# Altium PCB AC_board.PcbDoc (part 2 of 3)
Units mil, origin at the board's own origin, x right, y up, seen from the top; angles counter-clockwise.
Board outline 5905.51 x 3937.01 mil, 4 copper layers (Top Layer, Layer 1, Layer 2, Bottom Layer), stack 31.891 mil thick; 42 components, 37 nets, 171 pads, 2365 vias.
Unrouted connection lines stored in the file: 10.
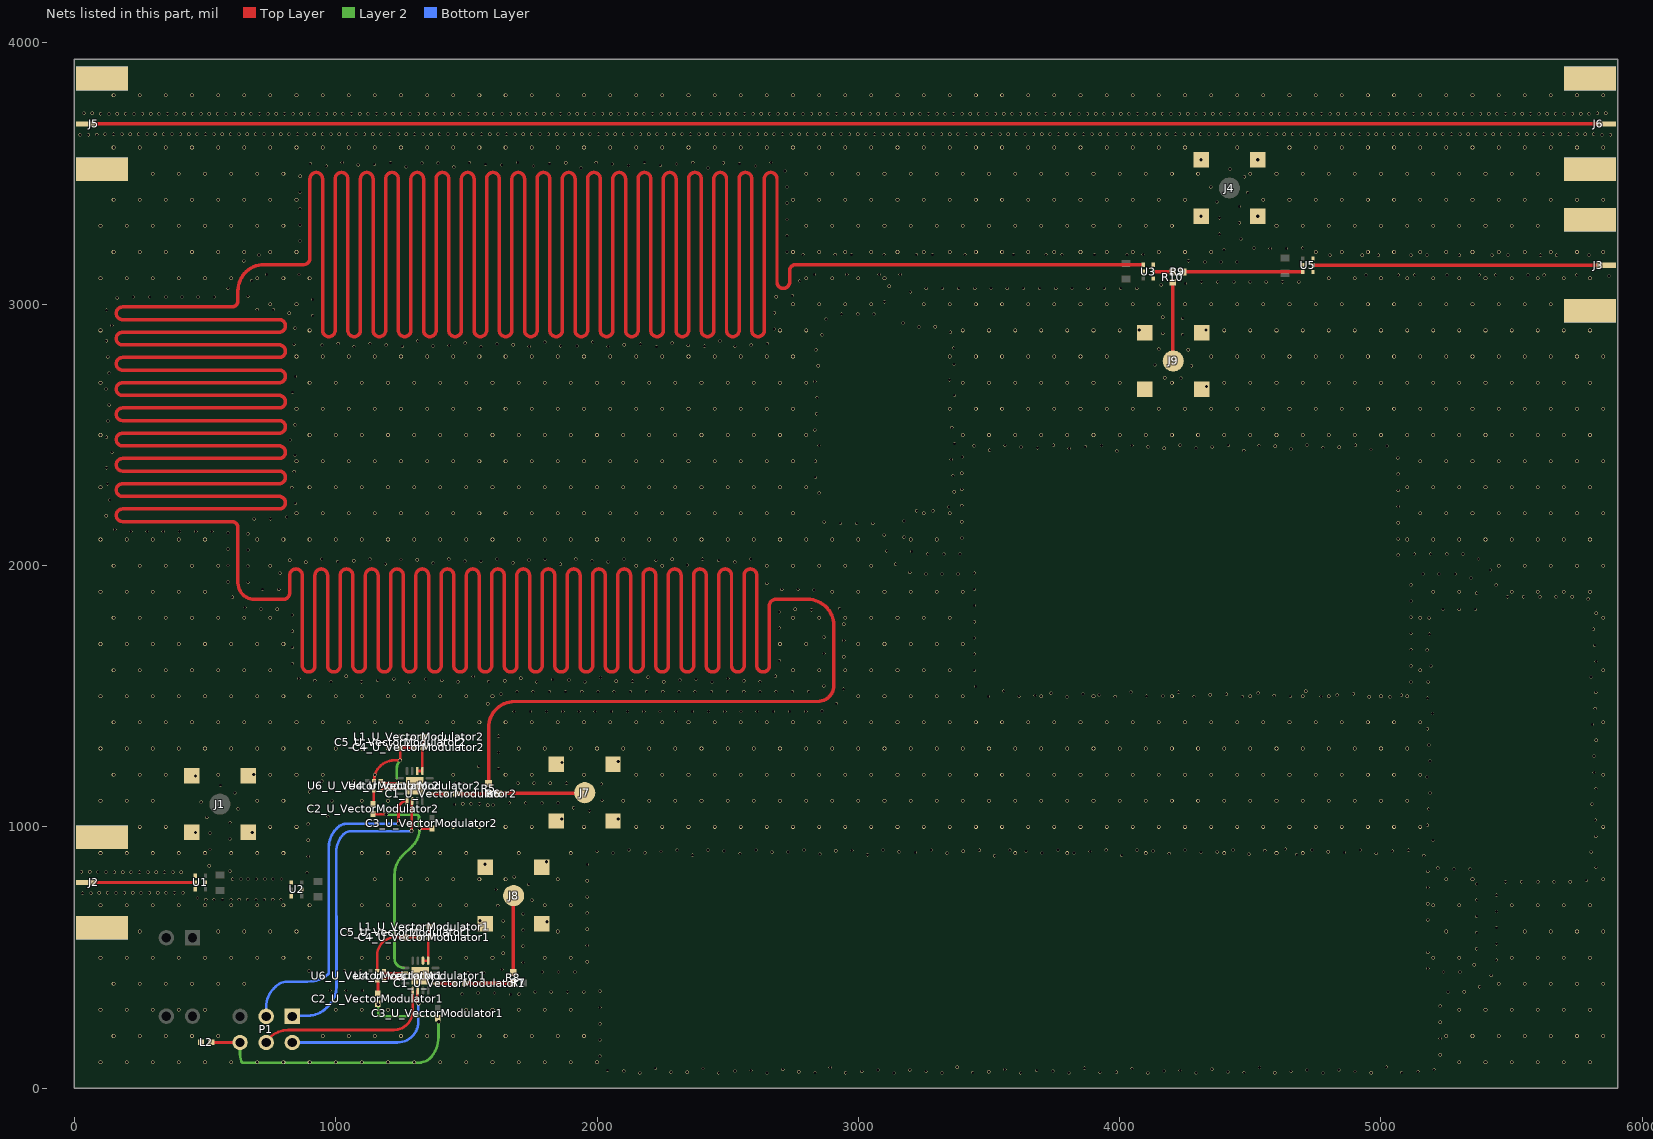
[diagram p4: the nets of this part, all layers, seen from the top]

## Via types
v1: diameter 12, hole 10, Top Layer to Bottom Layer, 1188 vias
v2: diameter 14, hole 10, Top Layer to Bottom Layer, 1145 vias
v3: diameter 15, hole 12, Top Layer to Bottom Layer, 21 vias
v4: diameter 14, hole 12, Top Layer to Bottom Layer, 11 vias

## Nets (pads, with @x,y where several pads share a name; then routed paths per layer and width w, separated by ;. In a path a pad name is that pad's centre, name@x,y a point inside that pad or via, vN(x,y) a via of type N, cw(c..) or ccw(c..) an arc to the next point about the centre after c; other vN are vias at no path point) (continued)
AGND: C2_U_VectorModulator1.1 C2_U_VectorModulator2.1 C3_U_VectorModulator1.1 C3_U_VectorModulator2.1 C4_U_VectorModulator1.1 C4_U_VectorModulator2.1 C5_U_VectorModulator1.1 C5_U_VectorModulator2.1 J1.G1 J1.G2 J1.G3 J1.G4 J2.GND J3.GND J4.G1 J4.G2 J4.G3 J4.G4 J5.GND J6.GND J7.G1 J7.G2 J7.G3 J7.G4 J8.G1 J8.G2 J8.G3 J8.G4 J9.G1 J9.G2 J9.G3 J9.G4 L2.1 L2.2 P1.6 U1.1 U1.3 U1.5 U2.1 U2.3 U2.5 U3.1 U3.3 U3.5 U4_U_VectorModulator1.17 U4_U_VectorModulator2.17 U5.1 U5.3 U5.5 U6_U_VectorModulator1.5 U6_U_VectorModulator2.5 | length 2777.9
  Top Layer w10: L2.2@527.67,175 P1.6@634,175 ; C2_U_VectorModulator2.1@1143.31,1049 ccw(c1144.38,1049) 1144.38,1047.94 v4(1193.28,1047.94) ; U6_U_VectorModulator2.5@1146.31,1176.49 cw(c1224.46,1176.49) 1224.46,1254.63 v4(1246.43,1254.63) 1246.43,1302.11 cw(c1248.31,1302.11) C5_U_VectorModulator2.1@1248.31,1304 C4_U_VectorModulator2.1@1297.63,1304 ; U6_U_VectorModulator1.5@1158.98,450 1158.98,509.93 cw(c1227.06,509.93) 1227.06,578 C5_U_VectorModulator1.1@1270.24,578 C4_U_VectorModulator1.1@1319.56,578 ; v4(1162.84,320.6) cw(c1165.24,320.6) C2_U_VectorModulator1.1@1165.24,323 ; v4(1321.23,993.8) 1368.31,993.8 C3_U_VectorModulator2.1@1368.31,994
  Layer 2 w10: P1.6@634,175 634,129.18 634,129.11 ccw(c709.77,129.11) 638.4,103.66 ccw(c647.83,107) 647.83,97 1310.53,97 cw(c1310.58,87) 1310.65,97 1311,97 ccw(c1311.46,177.02) 1358.66,112.4 1359.31,112.88 ccw(c1274.83,195.93) 1359.9,113.48 ccw(c1274.83,195.93) 1393.3,195.93 v4@1393.3,254.33 ; v4(1162.84,320.6) 1162.84,285.98 ccw(c1172.84,285.98) 1172.84,275.98 1372.5,275.98 cw(c1372.5,254.33) v4(1394.16,254.33) ; v4(1193.28,1047.94) ccw(c1197.72,1056.89) 1197.72,1046.89 1308.96,1046.89 cw(c1308.96,1036.89) 1318.96,1036.85 1318.96,1000.15 ccw(c1328.96,1000.15) v4(1321.23,993.8) cw(c1228.1,993.8) 1317.91,969.18 cw(c1228.1,993.8) 1293.95,927.95 1254.27,888.27 ccw(c1324.98,817.55) 1224.98,817.55 1224.98,575.8 v4@1224.98,575.74 ; v4@1225.83,574.81 ccw(c1224.85,574.81) v4(1224.85,575.8) 1224.85,574.81 1224.85,497.07 ccw(c1260.91,497.07) 1260.91,461.01 ; 1234,1187 1234,1224.63 cw(c1276.42,1224.63) v4(1246.43,1254.63)
  other v1: 2163.7,59.05 2465.41,58.99 2650.27,58.77 2951.32,59.36 3135.83,58.52 3320.27,59.41 3621.02,58.71 3805.84,59.08 4107.54,58.95 4292.41,58.77 4593.54,59.34 4778.08,58.54 4962.5,59.43 2833.98,59.84 3437.09,59.72 4476.03,59.93 5079.05,59.67 2283.37,61.11 2345.37,61.33 3925.32,60.99 3987.32,61.44 2772.06,62.99 3498.98,63.36 4414.09,62.85 3258.47,64.38 4900.69,64.32 5140.93,63.54 3013.1,64.53 4655.31,64.6 2102.07,65.8 2527,66.09 3744.19,65.66 4169.11,66.25 2040.12,68.3 2588.97,68.02 3682.26,68.44 4231.08,67.88 3074.87,69.85 3196.74,70.11 4717.1,69.74 4838.97,70.21 5202.42,71.48 2710.77,72.35 3560.41,71.76 4352.86,72.56 4047.74,75.34 2223.26,76.29 2405.69,75.66 3865.32,76.6 4534.88,79.43 2892.73,79.65 3378.63,80.36 5020.73,80.7 2011.06,123.07 5226.99,128.41 2011.06,185.07 5226.99,190.41 2011.06,247.07 5226.99,252.41 2011.06,309.07 5226.99,314.41 1669.49,358.94 1483.86,360.4 1701.81,359.56 1545.73,364.36 1607.73,364.36 1763.1,368.95 1825.1,368.95 1887.1,368.95 1949.1,368.95 5256.47,368.95 5318.47,369.46 2011.06,371.07 977.97,373.9 1039.97,373.9 1101.97,373.9 5377.53,388.31 5421.77,431.75 1568.13,440.46 1506.16,442.62 1790.71,445.05 1852.71,445.05 1914.71,445.05 5239.29,445.05 5301.29,445.05 897.95,449.67 1033.33,450 1095.33,450 1635.94,454.64 5178.68,458.1 5356.93,472.4 1717.05,481.31 1962.76,484.23 5441.34,490.58 1640.95,516.44 5178.68,520.1 5365.95,533.74 1717.05,543.31 1962.76,546.23 5442.05,552.58 1640.95,578.44 5365.95,595.74 1717.05,605.31 1962.76,608.23 5442.05,614.58 1640.95,640.44 5178.68,644.1 5365.95,657.74 1717.05,667.31 1962.76,670.23 5442.05,676.58 1620.22,698.87 5178.68,706.1 1750.54,719.49 5365.95,719.74 502.93,722.02 534.93,722.02 566.93,722.02 598.93,722.02 630.93,722.02 662.93,722.02 694.93,722.02 726.93,722.02 758.93,722.02 790.93,722.02 471,728 1962.76,732.23 5442.05,738.58 31.21,746.13 63.21,746.13 95.16,748 127.16,748 159.16,748 191.16,748 223.16,748 255.16,748 287.16,748 319.16,748 351.16,748 383.16,748 415.16,748 1613.2,760.47 5178.68,768.1 1738.11,780.23 5365.95,781.74 5476.29,790.27 5538.29,790.27 5600.29,790.27 5662.29,790.27 5724.29,790.27 1962.76,794.23 5786.07,795.5 605.47,799.81 637.47,800.81 664.47,800.81 696.47,800.81 728.47,800.81 760.47,800.81 792.47,800.81 1683.03,808.7 890.28,825.1 121.08,826.8 153.08,826.8 185.08,826.8 217.08,826.8 249.08,826.8 281.08,826.8 313.08,826.8 345.08,826.8 377.08,826.8 409.08,826.8 89.09,827.6 26.66,828.67 58.66,828.67 595.05,830.35 5178.68,830.1 5279.17,838.57 5341.17,838.57 5217.29,842.54 5823.06,845.25 515.99,851.68 1963.19,856.23 894.95,886.92 3521.61,889.89 5163.69,890.26 4007.45,891.29 2365.44,891.66 3035.14,893.53 4677.03,894.01 4494.61,895.4 2852.74,895.9 2547.56,897.72 4189.48,898.07 3339.94,899.25 4981.92,898.95 2061.2,900.26 3703.34,900.44 2183.08,901.14 3825.21,900.96 3218.06,902 4860.07,902.2 2669.29,903.06 4311.25,902.83 2731.28,904.15 4373.23,904.4 5804.52,904.41 3156.14,905.26 4798.14,905.04 1999.52,906.48 2244.9,905.95 3641.62,906.37 3887,906.06 3401.44,907.1 5043.36,907.29 2486.43,908.08 4128.26,907.85 2913.33,909.03 4555.05,909.21 2975.33,909.88 2306.66,911.37 2424.48,910.58 3463.32,911.02 3579.82,911.24 3948.78,911.33 4066.32,910.73 5105.25,910.96 2122.06,912.1 2607.92,911.9 2792.81,911.78 3094.46,911.54 3279.25,911.95 3764.23,912.13 4249.92,911.9 4434.79,911.72 4736.48,911.59 4921.3,911.96 518.95,913.61 4634,915 5199.04,948.43 894.95,948.92 595.05,954.35 5821.67,963.99 518.95,975.61 5177.5,1006.57 894.95,1010.92 595.05,1016.35 5820.38,1025.98 506.51,1036.35 971.05,1039.6 1971.12,1061.62 5182.32,1068.38 626.54,1069.76 894.95,1072.92 1910.27,1073.51 1581.65,1082.94 1603.15,1084.14 1454.3,1085.89 5808.12,1086.75 1486.18,1088.74 1518.18,1088.74 1550.18,1088.74 1664.77,1090.95 1726.77,1090.95 1788.77,1090.95 1850.77,1090.95 485.75,1094.77 985.28,1099.95 2018.4,1101.73 614.11,1130.5 5188.35,1130.09 900.11,1134.7 5823.42,1146.84 559.03,1158.97 2016.91,1163.71 1490.82,1165.05 1697.16,1167.05 1759.16,1167.05 1821.16,1167.05 1883.16,1167.05 1458.97,1168.11 1540.94,1169.8 947.15,1175.1 1071.14,1176.05 5176.6,1190.96 5815.42,1208.32 1623.05,1222.93 1546.95,1231.5 5187.7,1251.96 5814.94,1270.32 1623.05,1284.93 1546.95,1293.5 5182.7,1313.76 5823.48,1331.73 1623.05,1346.93 1546.95,1355.5 5177.38,1375.53 5808.83,1391.98 5197.31,1434.24 1682.79,1441.66 1744.79,1441.95 1806.79,1441.95 1868.79,1441.95 1930.79,1441.95 1992.79,1441.95 2054.79,1441.95 2116.79,1441.95 2178.79,1441.95 2240.79,1441.95 2302.79,1441.95 2364.79,1441.95 2426.79,1441.95 2488.79,1441.95 2550.79,1441.95 2612.79,1441.95 2674.79,1441.95 2736.79,1441.95 2798.79,1441.95 2860.77,1443.16 5819.96,1452.97 1581.91,1471.66 2915.79,1471.74 5178.05,1493.17 3798.3,1498.44 4469.71,1498.48 4955.27,1498.23 5035,1498 3497.45,1499.1 3614.43,1499.46 3983.13,1498.76 4284.84,1498.69 4770.76,1499.07 4653.4,1499.56 4102.78,1500.8 4164.78,1501.05 3676.33,1502.96 4591.48,1502.68 4832.54,1504.25 5077.91,1504.08 3921.5,1505.49 4346.43,1505.82 1632.48,1507.53 3859.55,1508.03 4408.4,1507.71 4894.32,1509.54 3737.72,1511.63 4530.2,1512.08 4225.11,1515.33 5821.97,1514.94 4042.68,1516.03 1693.58,1518.05 1755.58,1518.05 1817.58,1518.05 1879.58,1518.05 1941.58,1518.05 2003.58,1518.05 2065.58,1518.05 2127.58,1518.05 2189.58,1518.05 2251.58,1518.05 2313.58,1518.05 2375.58,1518.05 2437.58,1518.05 2499.58,1518.05 2561.58,1518.05 2623.58,1518.05 2685.58,1518.05 2747.58,1518.05 2809.58,1518.05 4712.16,1519.33 3555.88,1519.86 2943.06,1527.42 3448.69,1537.39 2867.62,1539.85 1283.04,1554.85 1768.64,1555.1 1953.51,1555.3 2255.21,1555.38 2440.04,1555.05 5113.87,1554.59 5180.79,1555.11 981.89,1556.02 1098.61,1555.74 1467.56,1555.68 1584.97,1556.2 2623.93,1556.07 2135.63,1557.38 2073.63,1557.7 1646.9,1559.25 920.01,1559.76 2562.04,1559.61 1160.41,1560.68 1405.78,1560.89 1891.93,1562.48 2316.85,1562.07 1829.96,1564.29 2378.8,1564.69 1222.14,1566.47 1344,1566.13 858.55,1567.97 2500.63,1568.19 1708.17,1568.76 2013.26,1571.85 2195.69,1572.74 5803.73,1574.19 1526.18,1575.88 1040.3,1576.82 2682.46,1576.54 3444.08,1599.22 5190.78,1616.3 5114.24,1616.59 834.2,1624.99 5822.99,1633.13 2697.59,1636.67 2944.05,1651.41 3444.08,1661.22 2867.95,1663.84 5176.82,1676.71 5114.24,1678.59 834.2,1686.99 5817.37,1694.87 2944.05,1713.41 3444.08,1723.22 2867.95,1725.84 5185.82,1738.06 5114.24,1740.59 834.2,1748.99 5812.98,1756.72 2697.59,1760.67 2944,1775.41 3444.08,1785.22 5184.41,1800.04 5114.24,1802.59 834.2,1810.99 5823.64,1817.79 2697.59,1822.67 2820.7,1830.89 5237.3,1832.39 5299.3,1832.47 5361.3,1832.47 714.22,1832.95 776.22,1832.95 2758.73,1832.95 2928.22,1835.37 652.59,1839.67 3444.08,1847.22 5114.24,1864.59 5793.27,1871.85 604.42,1878.71 5483.92,1880.77 5545.92,1880.77 5607.92,1880.77 5669.92,1880.77 5731.92,1880.77 5365.95,1894.29 2830.78,1906.89 719.96,1909.05 781.96,1909.05 2706.82,1909.05 2768.82,1909.05 3444.08,1909.22 5440.81,1925.33 5114.24,1926.59 2649.28,1932.15 664.05,1935.84 587.95,1938.48 5344.47,1952.45 3258.17,1967.95 3320.17,1967.95 3382.17,1967.95 5160.43,1967.95 5222.43,1967.95 5284.43,1967.95 786.52,1970.88 3444.08,1971.22 3196.45,1973.92 5418.47,1983.17 664.05,1997.84 587.95,2000.48 2345.67,2002.26 1859.98,2005.1 3142.83,2005.05 1190.25,2006.59 1372.63,2009.4 1677.82,2010.82 885.5,2012.64 2527.05,2013.27 2042.4,2014.5 1007.39,2015.18 1556.12,2016.44 1494.13,2017.31 1069.29,2018.62 1980.57,2019.16 823.97,2020.29 2225.96,2019.8 2465.41,2019.9 1738.91,2021.45 1311.97,2022.22 1249.98,2023.22 1800.86,2023.78 2287.78,2024.46 2403.57,2024.43 946.21,2025.24 1130.98,2024.79 1432.62,2025.06 1617.51,2025.17 1918.82,2024.65 2103.44,2025.36 2587.87,2025.33 5373.09,2025.42 5065.94,2040.08 3265.08,2044.05 3327.08,2044.05 3389.08,2044.05 5127.81,2044.05 5189.81,2044.05 5251.81,2044.05 5313.81,2043.57 3203.87,2053.89 3108.22,2056.49 664.05,2059.84 587.95,2062.48 5065.94,2102.08 3395.77,2105.69 3175.05,2108.78 3098.95,2117.79 664.05,2121.84 587.95,2124.48 216.24,2130.48 278.24,2130.48 340.24,2130.48 402.24,2130.48 464.24,2130.48 526.24,2130.48 154.7,2138 2931.25,2161.77 2993.25,2161.77 3055.25,2161.77 5065.94,2164.08 2869.5,2167.41 3395.77,2167.69 3175.05,2170.78 688.57,2178.78 750.57,2178.78 812.16,2185.89 121.99,2190.67 3223.01,2210.08 3285.01,2210.08 3345.31,2224.48 5065.94,2226.08 3395.77,2229.69 845.52,2238.15 135.05,2251.28 2850.62,2277.33 3366.89,2282.6 5065.94,2288.08 3395.77,2291.69 831.77,2298.61 126.64,2312.71 2835.4,2337.43 3362.71,2344.46 5065.94,2350.08 3395.77,2353.69 841.42,2359.86 123.01,2374.6 2835.65,2399.43 3355.39,2406.03 5064.34,2412.06 3398.33,2415.64 844.38,2421.78 143.63,2433.07 3988.8,2438.13 4474.59,2440.11 3502.57,2441.61 4961.83,2444.3 4656.67,2446.45 3807.24,2448.14 4170.4,2448.92 3685.35,2450.38 4292.28,2449.66 4778.42,2451.56 4840.4,2452.84 3623.47,2454.09 4108.7,2455.03 4354.08,2454.59 3868.8,2455.51 4595.51,2456.59 5022.37,2457.69 3442.97,2458.66 4533.56,2459.23 2849.93,2459.76 3561.76,2460.09 3930.67,2459.67 4046.89,2459.82 4415.85,2459.95 4717.06,2460.5 4901.95,2460.35 3746.51,2460.59 4231.27,2460.71 3367.81,2466.77 824.82,2480.62 122.69,2491.43 2833.29,2519.48 3357.57,2527.92 844.94,2539.26 127.67,2553.23 2840.41,2581.07 133.39,2614.96 2842.31,2643.04 3367.3,2651.51 834.53,2662.82 121.81,2675.87 2833.08,2704.35 3348.78,2710.68 4234.34,2717.63 4172.35,2719.05 845.76,2723.8 133.14,2736.83 2846.67,2764.84 4274.4,2764.95 4134.7,2768.31 3365.9,2770.27 127.82,2798.6 2837.28,2826.13 4262.44,2825.79 4149.63,2828.49 3364.63,2832.26 1070.56,2837.91 1556.03,2838.17 1740.89,2838.41 2042.6,2838.42 2227.45,2838.17 1255.04,2838.78 1372.26,2839.2 2411.26,2839.18 2528.39,2838.78 1860.79,2840.64 1922.79,2840.59 1434.17,2842.49 2349.36,2842.55 947.89,2843.83 1193.25,2843.88 2590.18,2843.86 1679.28,2845.38 2104.21,2845.31 839.96,2846.41 1617.32,2847.53 2166.17,2847.59 1009.63,2849.42 1131.49,2849.33 2651.94,2849.37 2288,2851.49 1495.5,2851.58 1800.54,2855.3 1982.98,2855.44 1313.58,2859.22 2469.9,2859.33 122.65,2860.38 2861.53,2883.19 4241.05,2883.98 4164.95,2888.57 3352.33,2893.03 2678.47,2905.41 844.87,2908.22 3232.04,2914.14 3294.04,2914.14 142.94,2918.97 3171.72,2928.48 2876.54,2943.34 4241.05,2945.98 4164.95,2950.57 911.69,2956.42 2935.52,2962.45 2997.52,2962.45 3059.52,2962.45 822.06,2965.87 2678.47,2967.41 123.12,2977.72 699.56,2979.46 761.56,2979.46 3099.88,3009.51 911.69,3018.42 163.94,3024.39 225.85,3027.76 287.85,3027.76 349.85,3027.76 411.85,3027.76 473.85,3027.76 535.85,3027.76 2685.7,3028.99 664.05,3030.28 2747.55,3033.29 3199.07,3047.55 588.34,3060.75 3259.6,3060.97 3321.6,3060.97 3383.6,3060.97 3445.6,3060.97 3507.6,3060.97 3569.6,3060.97 3631.6,3060.97 3693.6,3060.97 3755.6,3060.97 3817.6,3060.97 3879.6,3060.97 3941.6,3060.97 4003.6,3060.97 4065.6,3060.97 3118.01,3068.8 4158.94,3074.27 4251.33,3079.56 4313.03,3085.65 4375.03,3085.72 4437.03,3085.8 4499.03,3085.87 4561.03,3085.94 4623.03,3086.01 4685.03,3085.93 2775.08,3088.84 678.08,3090.67 5872.42,3108.34 4942.5,3111.56 5066.5,3111.56 5128.5,3111.56 5252.5,3111.56 5376.5,3111.56 5438.5,3111.56 5562.5,3111.56 5624.5,3111.56 5748.5,3111.56 735.54,3113.95 859.54,3113.95 2831.77,3113.95 2955.77,3113.95 3079.77,3113.95 3160.54,3113.92 4325.38,3161.77 4387.38,3161.84 4449.38,3161.91 647.9,3165.9 4263.57,3166.62 4804.19,3187.66 4928.19,3187.66 4990.19,3187.66 5114.19,3187.66 5176.19,3187.66 5300.19,3187.66 5424.19,3187.66 5486.19,3187.66 5610.19,3187.66 5672.19,3187.66 5796.19,3187.66 705.61,3188.58 2787.86,3190.05 2911.86,3190.05 2973.86,3190.05 3097.86,3190.05 3221.86,3190.05 3283.86,3190.05 3407.86,3190.05 3593.86,3190.05 3717.86,3190.05 3779.86,3190.05 3903.86,3190.05 4027.86,3190.05 4089.86,3190.32 2726.77,3200.63 4399.06,3208.98 4514.12,3214.29 4576.12,3213.64 4638.12,3213.64 4700.1,3214.93 863.39,3242.03 4463.67,3250.34 2726.77,3262.63 4382.2,3268.65 863.39,3304.03 4458.05,3312.08 2726.77,3324.63 4381.95,3330.65 863.39,3366.03 4458.05,3374.08 2726.77,3386.63 4371.79,3391.81 4489.54,3427.49 863.39,3428.03 2726.77,3448.63 4348.31,3449.19 4477.11,3488.23 864.24,3490.02 2719.11,3510.16 4422.03,3516.7 1938.69,3521.19 2424.61,3521.53 1451.88,3525.02 1269.45,3525.68 964.37,3528.97 1756.85,3529.39 2606.54,3529.12 2120.66,3531.29 2242.52,3531.4 1086.17,3533.31 1635.01,3533.02 1148.14,3535.23 1573.06,3535.53 2058.92,3536.9 2304.29,3536.84 903.08,3538.35 1818.24,3538.08 2545.22,3538.25 1329.77,3539.99 1391.77,3540.22 1209.73,3542.34 1511.43,3542.28 1880.14,3541.57 1997.12,3541.93 2366.07,3541.95 2483.3,3541.52 1024.86,3542.55 1696.27,3542.59 2181.58,3542.81 2666.28,3542.6 21.76,3648.73 53.76,3648.73 85.76,3649.36 5845.68,3648.73 5877.68,3648.73 117.73,3650.6 149.73,3650.6 181.73,3650.6 213.73,3650.6 245.73,3650.6 277.73,3650.6 309.73,3650.6 341.73,3650.6 373.73,3650.6 405.73,3650.6 437.73,3650.6 469.73,3650.6 501.73,3650.6 533.73,3650.6 565.73,3650.6 597.73,3650.6 629.73,3650.6 661.73,3650.6 693.73,3650.6 725.73,3650.6 757.73,3650.6 789.73,3650.6 821.73,3650.6 853.73,3650.6 885.73,3650.6 917.73,3650.6 949.73,3650.6 981.73,3650.6 1013.73,3650.6 1045.73,3650.6 1077.73,3650.6 1109.73,3650.6 1141.73,3650.6 1173.73,3650.6 1205.73,3650.6 1237.73,3650.6 1269.73,3650.6 1301.73,3650.6 1333.73,3650.6 1365.73,3650.6 1397.73,3650.6 1429.73,3650.6 1461.73,3650.6 1493.73,3650.6 1525.73,3650.6 1557.73,3650.6 1589.73,3650.6 1621.73,3650.6 1653.73,3650.6 1685.73,3650.6 1717.73,3650.6 1749.73,3650.6 1781.73,3650.6 1813.73,3650.6 1845.73,3650.6 1877.73,3650.6 1909.73,3650.6 1941.73,3650.6 1973.73,3650.6 2005.73,3650.6 2037.73,3650.6 2069.73,3650.6 2101.73,3650.6 2133.73,3650.6 2165.73,3650.6 2197.73,3650.6 2229.73,3650.6 2261.73,3650.6 2293.73,3650.6 2325.73,3650.6 2357.73,3650.6 2389.73,3650.6 2421.73,3650.6 2453.73,3650.6 2485.73,3650.6 2517.73,3650.6 2549.73,3650.6 2581.73,3650.6 2613.73,3650.6 2645.73,3650.6 2677.73,3650.6 2709.73,3650.6 2741.73,3650.6 2773.73,3650.6 2805.73,3650.6 2837.73,3650.6 2869.73,3650.6 2901.73,3650.6 2933.73,3650.6 2965.73,3650.6 2997.73,3650.6 3029.73,3650.6 3061.73,3650.6 3093.73,3650.6 3125.73,3650.6 3157.73,3650.6 3189.73,3650.6 3221.73,3650.6 3253.73,3650.6 3285.73,3650.6 3317.73,3650.6 3349.73,3650.6 3381.73,3650.6 3413.73,3650.6 3445.73,3650.6 3477.73,3650.6 3509.73,3650.6 3541.73,3650.6 3573.73,3650.6 3605.73,3650.6 3637.73,3650.6 3669.73,3650.6 3701.73,3650.6 3733.73,3650.6 3765.73,3650.6 3797.73,3650.6 3829.73,3650.6 3861.73,3650.6 3893.73,3650.6 3925.73,3650.6 3957.73,3650.6 3989.73,3650.6 4021.73,3650.6 4053.73,3650.6 4085.73,3650.6 4117.73,3650.6 4149.73,3650.6 4181.73,3650.6 4213.73,3650.6 4245.73,3650.6 4277.73,3650.6 4309.73,3650.6 4341.73,3650.6 4373.73,3650.6 4405.73,3650.6 4437.73,3650.6 4469.73,3650.6 4501.73,3650.6 4533.73,3650.6 4565.73,3650.6 4597.73,3650.6 4629.73,3650.6 4661.73,3650.6 4693.73,3650.6 4725.73,3650.6 4757.73,3650.6 4789.73,3650.6 4821.73,3650.6 4853.73,3650.6 4885.73,3650.6 4917.73,3650.6 4949.73,3650.6 4981.73,3650.6 5013.73,3650.6 5045.73,3650.6 5077.73,3650.6 5109.73,3650.6 5141.73,3650.6 5173.73,3650.6 5205.73,3650.6 5237.73,3650.6 5269.73,3650.6 5301.73,3650.6 5333.73,3650.6 5365.73,3650.6 5397.73,3650.6 5429.73,3650.6 5461.73,3650.6 5493.73,3650.6 5525.73,3650.6 5557.73,3650.6 5589.73,3650.6 5621.73,3650.6 5653.73,3650.6 5685.73,3650.6 5717.73,3650.6 5749.73,3650.6 5781.73,3650.6 5813.73,3650.6 100.29,3729.4 132.29,3729.4 164.29,3729.4 196.29,3729.4 228.29,3729.4 260.29,3729.4 292.29,3729.4 324.29,3729.4 356.29,3729.4 388.29,3729.4 420.29,3729.4 452.29,3729.4 484.29,3729.4 516.29,3729.4 548.29,3729.4 580.29,3729.4 612.29,3729.4 644.29,3729.4 676.29,3729.4 708.29,3729.4 740.29,3729.4 772.29,3729.4 804.29,3729.4 836.29,3729.4 868.29,3729.4 900.29,3729.4 932.29,3729.4 964.29,3729.4 996.29,3729.4 1028.29,3729.4 1060.29,3729.4 1092.29,3729.4 1124.29,3729.4 1156.29,3729.4 1188.29,3729.4 1220.29,3729.4 1252.29,3729.4 1284.29,3729.4 1316.29,3729.4 1348.29,3729.4 1380.29,3729.4 1412.29,3729.4 1444.29,3729.4 1476.29,3729.4 1508.29,3729.4 1540.29,3729.4 1572.29,3729.4 1604.29,3729.4 1636.29,3729.4 1668.29,3729.4 1700.29,3729.4 1732.29,3729.4 1764.29,3729.4 1796.29,3729.4 1828.29,3729.4 1860.29,3729.4 1892.29,3729.4 1924.29,3729.4 1956.29,3729.4 1988.29,3729.4 2020.29,3729.4 2052.29,3729.4 2084.29,3729.4 2116.29,3729.4 2148.29,3729.4 2180.29,3729.4 2212.29,3729.4 2244.29,3729.4 2276.29,3729.4 2308.29,3729.4 2340.29,3729.4 2372.29,3729.4 2404.29,3729.4 2436.29,3729.4 2468.29,3729.4 2500.29,3729.4 2532.29,3729.4 2564.29,3729.4 2596.29,3729.4 2628.29,3729.4 2660.29,3729.4 2692.29,3729.4 2724.29,3729.4 2756.29,3729.4 2788.29,3729.4 2820.29,3729.4 2852.29,3729.4 2884.29,3729.4 2916.29,3729.4 2948.29,3729.4 2980.29,3729.4 3012.29,3729.4 3044.29,3729.4 3076.29,3729.4 3108.29,3729.4 3140.29,3729.4 3172.29,3729.4 3204.29,3729.4 3236.29,3729.4 3268.29,3729.4 3300.29,3729.4 3332.29,3729.4 3364.29,3729.4 3396.29,3729.4 3428.29,3729.4 3460.29,3729.4 3492.29,3729.4 3524.29,3729.4 3556.29,3729.4 3588.29,3729.4 3620.29,3729.4 3652.29,3729.4 3684.29,3729.4 3716.29,3729.4 3748.29,3729.4 3780.29,3729.4 3812.29,3729.4 3844.29,3729.4 3876.29,3729.4 3908.29,3729.4 3940.29,3729.4 3972.29,3729.4 4004.29,3729.4 4036.29,3729.4 4068.29,3729.4 4100.29,3729.4 4132.29,3729.4 4164.29,3729.4 4196.29,3729.4 4228.29,3729.4 4260.29,3729.4 4292.29,3729.4 4324.29,3729.4 4356.29,3729.4 4388.29,3729.4 4420.29,3729.4 4452.29,3729.4 4484.29,3729.4 4516.29,3729.4 4548.29,3729.4 4580.29,3729.4 4612.29,3729.4 4644.29,3729.4 4676.29,3729.4 4708.29,3729.4 4740.29,3729.4 4772.29,3729.4 4804.29,3729.4 4836.29,3729.4 4868.29,3729.4 4900.29,3729.4 4932.29,3729.4 4964.29,3729.4 4996.29,3729.4 5028.29,3729.4 5060.29,3729.4 5092.29,3729.4 5124.29,3729.4 5156.29,3729.4 5188.29,3729.4 5220.29,3729.4 5252.29,3729.4 5284.29,3729.4 5316.29,3729.4 5348.29,3729.4 5380.29,3729.4 5412.29,3729.4 5444.29,3729.4 5476.29,3729.4 5508.29,3729.4 5540.29,3729.4 5572.29,3729.4 5604.29,3729.4 5636.29,3729.4 5668.29,3729.4 5700.29,3729.4 5732.29,3729.4 5764.29,3729.4 5796.29,3729.4 36.34,3731.27 68.34,3731.27 5828.23,3731.27 5860.23,3731.27
  other v2: 100,100 200,100 300,100 400,100 500,100 600,100 700,100 800,100 900,100 1000,100 1100,100 1200,100 1300,100 1400,100 1500,100 1600,100 1700,100 1800,100 1900,100 2000,100 5300,100 5400,100 5500,100 5600,100 5700,100 5800,100 150,200 250,200 350,200 450,200 550,200 950,200 1050,200 1150,200 1250,200 1350,200 1450,200 1550,200 1650,200 1750,200 1850,200 1950,200 5250,200 5350,200 5450,200 5550,200 5650,200 5750,200 5850,200 100,300 200,300 300,300 400,300 500,300 1000,300 1100,300 1200,300 1500,300 1600,300 1700,300 1800,300 1900,300 5300,300 5400,300 5500,300 5600,300 5700,300 5800,300 150,400 250,400 350,400 450,400 550,400 650,400 5450,400 5550,400 5650,400 5750,400 5850,400 100,500 200,500 300,500 400,500 500,500 600,500 700,500 800,500 900,500 1100,500 1200,500 1400,500 1500,500 1600,500 1800,500 1900,500 5200,500 5300,500 5500,500 5600,500 5700,500 5800,500 250,600 550,600 650,600 750,600 850,600 1050,600 1450,600 1850,600 5250,600 5550,600 5650,600 5750,600 5850,600 100,700 200,700 300,700 400,700 500,700 600,700 700,700 800,700 900,700 1100,700 1200,700 1300,700 1400,700 1500,700 1800,700 1900,700 5200,700 5300,700 5500,700 5600,700 5700,700 5800,700 1150,800 1250,800 1350,800 1450,800 1550,800 1650,800 1850,800 5250,800 5350,800 5850,800 100,900 200,900 300,900 400,900 500,900 600,900 700,900 800,900 1100,900 1200,900 1300,900 1400,900 1500,900 1700,900 1900,900 3600,900 3800,900 4100,900 4400,900 4600,900 4700,900 250,1000 350,1000 750,1000 850,1000 1450,1000 1550,1000 1650,1000 1750,1000 1950,1000 2150,1000 2250,1000 2350,1000 2450,1000 2550,1000 2650,1000 2750,1000 2850,1000 2950,1000 3050,1000 3150,1000 3250,1000 3350,1000 3450,1000 3550,1000 3650,1000 3750,1000 3850,1000 3950,1000 4050,1000 4150,1000 4250,1000 4350,1000 4450,1000 4550,1000 4650,1000 4750,1000 4850,1000 4950,1000 5050,1000 5150,1000 5850,1000 100,1100 200,1100 300,1100 700,1100 800,1100 1100,1100 1200,1100 2100,1100 2200,1100 2300,1100 2400,1100 2500,1100 2600,1100 2700,1100 2800,1100 2900,1100 3000,1100 3100,1100 3200,1100 3300,1100 3400,1100 3500,1100 3600,1100 3700,1100 3800,1100 3900,1100 4000,1100 4100,1100 4200,1100 4300,1100 4400,1100 4500,1100 4600,1100 4700,1100 4800,1100 4900,1100 5000,1100 5100,1100 150,1200 250,1200 350,1200 550,1200 750,1200 850,1200 950,1200 1150,1200 1450,1200 1650,1200 1750,1200 1950,1200 2150,1200 2250,1200 2350,1200 2450,1200 2550,1200 2650,1200 2750,1200 2850,1200 2950,1200 3050,1200 3150,1200 3250,1200 3350,1200 3450,1200 3550,1200 3650,1200 3750,1200 3850,1200 3950,1200 4050,1200 4150,1200 4250,1200 4350,1200 4450,1200 4550,1200 4650,1200 4750,1200 4850,1200 4950,1200 5050,1200 5150,1200 5850,1200 100,1300 200,1300 300,1300 400,1300 500,1300 600,1300 700,1300 800,1300 900,1300 1000,1300 1100,1300 1200,1300 1400,1300 1500,1300 1700,1300 1800,1300 1900,1300 2000,1300 2100,1300 2200,1300 2300,1300 2400,1300 2500,1300 2600,1300 2700,1300 2800,1300 2900,1300 3000,1300 3100,1300 3200,1300 3300,1300 3400,1300 3500,1300 3600,1300 3700,1300 3800,1300 3900,1300 4000,1300 4100,1300 4200,1300 4300,1300 4400,1300 4500,1300 4600,1300 4700,1300 4800,1300 4900,1300 5000,1300 5100,1300 150,1400 250,1400 350,1400 450,1400 550,1400 650,1400 750,1400 850,1400 950,1400 1050,1400 1150,1400 1250,1400 1350,1400 1450,1400 1550,1400 1650,1400 1750,1400 1850,1400 1950,1400 2050,1400 2150,1400 2250,1400 2350,1400 2450,1400 2550,1400 2650,1400 2750,1400 2850,1400 2950,1400 3050,1400 3150,1400 3250,1400 3350,1400 3450,1400 3550,1400 3650,1400 3750,1400 3850,1400 3950,1400 4050,1400 4150,1400 4250,1400 4350,1400 4450,1400 4550,1400 4650,1400 4750,1400 4850,1400 4950,1400 5050,1400 5150,1400 5850,1400 100,1500 200,1500 300,1500 400,1500 500,1500 600,1500 700,1500 800,1500 900,1500 1000,1500 1100,1500 1200,1500 1300,1500 1400,1500 1500,1500 1600,1500 3000,1500 3100,1500 3200,1500 3300,1500 3400,1500 3700,1500 3900,1500 4200,1500 4500,1500 4700,1500 4800,1500 5000,1500 5100,1500 150,1600 250,1600 350,1600 450,1600 550,1600 650,1600 750,1600 2750,1600 2850,1600 2950,1600 3050,1600 3150,1600 3250,1600 3350,1600 5150,1600 5850,1600 100,1700 200,1700 300,1700 400,1700 500,1700 600,1700 700,1700 800,1700 2700,1700 2800,1700 3000,1700 3100,1700 3200,1700 3300,1700 3400,1700 150,1800 250,1800 350,1800 450,1800 550,1800 650,1800 750,1800 2750,1800 2850,1800 2950,1800 3050,1800 3150,1800 3250,1800 3350,1800 5150,1800 5850,1800 100,1900 200,1900 300,1900 400,1900 500,1900 2900,1900 3000,1900 3100,1900 3200,1900 3300,1900 3400,1900 5200,1900 5300,1900 5500,1900 5600,1900 5700,1900 5800,1900 150,2000 250,2000 350,2000 450,2000 550,2000 750,2000 2150,2000 2250,2000 2650,2000 2750,2000 2850,2000 2950,2000 3050,2000 5450,2000 5550,2000 5650,2000 5750,2000 5850,2000 100,2100 200,2100 300,2100 400,2100 500,2100 700,2100 800,2100 900,2100 1000,2100 1100,2100 1200,2100 1300,2100 1400,2100 1500,2100 1600,2100 1700,2100 1800,2100 1900,2100 2000,2100 2100,2100 2200,2100 2300,2100 2400,2100 2500,2100 2600,2100 2700,2100 2800,2100 2900,2100 3000,2100 3200,2100 3300,2100 5100,2100 5200,2100 5300,2100 5400,2100 5500,2100 5600,2100 5700,2100 5800,2100 850,2200 950,2200 1050,2200 1150,2200 1250,2200 1350,2200 1450,2200 1550,2200 1650,2200 1750,2200 1850,2200 1950,2200 2050,2200 2150,2200 2250,2200 2350,2200 2450,2200 2550,2200 2650,2200 2750,2200 3250,2200 3350,2200 5150,2200 5250,2200 5350,2200 5450,2200 5550,2200 5650,2200 5750,2200 5850,2200 100,2300 900,2300 1000,2300 1100,2300 1200,2300 1300,2300 1400,2300 1500,2300 1600,2300 1700,2300 1800,2300 1900,2300 2000,2300 2100,2300 2200,2300 2300,2300 2400,2300 2500,2300 2600,2300 2700,2300 2800,2300 5100,2300 5200,2300 5300,2300 5400,2300 5500,2300 5600,2300 5700,2300 5800,2300 850,2400 950,2400 1050,2400 1150,2400 1250,2400 1350,2400 1450,2400 1550,2400 1650,2400 1750,2400 1850,2400 1950,2400 2050,2400 2150,2400 2250,2400 2350,2400 2450,2400 2550,2400 2650,2400 2750,2400 5150,2400 5250,2400 5350,2400 5450,2400 5550,2400 5650,2400 5750,2400 5850,2400 100,2500 900,2500 1000,2500 1100,2500 1200,2500 1300,2500 1400,2500 1500,2500 1600,2500 1700,2500 1800,2500 1900,2500 2000,2500 2100,2500 2200,2500 2300,2500 2400,2500 2500,2500 2600,2500 2700,2500 2800,2500 3400,2500 3500,2500 3600,2500 3700,2500 3800,2500 3900,2500 4000,2500 4100,2500 4200,2500 4300,2500 4400,2500 4500,2500 4600,2500 4700,2500 4800,2500 4900,2500 5000,2500 5100,2500 5200,2500 5300,2500 5400,2500 5500,2500 5600,2500 5700,2500 5800,2500 850,2600 950,2600 1050,2600 1150,2600 1250,2600 1350,2600 1450,2600 1550,2600 1650,2600 1750,2600 1850,2600 1950,2600 2050,2600 2150,2600 2250,2600 2350,2600 2450,2600 2550,2600 2650,2600 2750,2600 3350,2600 3450,2600 3550,2600 3650,2600 3750,2600 3850,2600 3950,2600 4050,2600 4150,2600 4250,2600 4350,2600 4450,2600 4550,2600 4650,2600 4750,2600 4850,2600 4950,2600 5050,2600 5150,2600 5250,2600 5350,2600 5450,2600 5550,2600 5650,2600 5750,2600 5850,2600 100,2700 900,2700 1000,2700 1100,2700 1200,2700 1300,2700 1400,2700 1500,2700 1600,2700 1700,2700 1800,2700 1900,2700 2000,2700 2100,2700 2200,2700 2300,2700 2400,2700 2500,2700 2600,2700 2700,2700 2800,2700 3400,2700 3500,2700 3600,2700 3700,2700 3800,2700 3900,2700 4000,2700 4200,2700 4400,2700 4500,2700 4600,2700 4700,2700 4800,2700 4900,2700 5000,2700 5100,2700 5200,2700 5300,2700 5400,2700 5500,2700 5600,2700 5700,2700 5800,2700 850,2800 950,2800 1050,2800 1150,2800 1250,2800 1350,2800 1450,2800 1550,2800 1650,2800 1750,2800 1850,2800 1950,2800 2050,2800 2150,2800 2250,2800 2350,2800 2450,2800 2550,2800 2650,2800 2750,2800 3350,2800 3450,2800 3550,2800 3650,2800 3750,2800 3850,2800 3950,2800 4350,2800 4450,2800 4550,2800 4650,2800 4750,2800 4850,2800 4950,2800 5050,2800 5150,2800 5250,2800 5350,2800 5450,2800 5550,2800 5650,2800 5750,2800 5850,2800 100,2900 900,2900 2700,2900 2800,2900 3400,2900 3500,2900 3600,2900 3700,2900 3800,2900 3900,2900 4000,2900 4400,2900 4500,2900 4600,2900 4700,2900 4800,2900 4900,2900 5000,2900 5100,2900 5200,2900 5300,2900 5400,2900 5500,2900 5600,2900 5700,2900 5800,2900 750,3000 850,3000 2750,3000 2850,3000 2950,3000 3050,3000 3250,3000 3350,3000 3450,3000 3550,3000 3650,3000 3750,3000 3850,3000 3950,3000 4050,3000 4150,3000 4250,3000 4350,3000 4450,3000 4550,3000 4650,3000 4750,3000 4850,3000 4950,3000 5050,3000 5150,3000 5250,3000 5350,3000 5450,3000 5550,3000 5650,3000 100,3100 200,3100 300,3100 400,3100 500,3100 600,3100 700,3100 800,3100 900,3100 2800,3100 2900,3100 3000,3100 3100,3100 4800,3100 4900,3100 5000,3100 5100,3100 5200,3100 5300,3100 5400,3100 5500,3100 5600,3100 5700,3100 5800,3100 150,3200 250,3200 350,3200 450,3200 550,3200 650,3200 750,3200 850,3200 2750,3200 2850,3200 2950,3200 3050,3200 3150,3200 3250,3200 3350,3200 3450,3200 3550,3200 3650,3200 3750,3200 3850,3200 3950,3200 4050,3200 4150,3200 4250,3200 4350,3200 4750,3200 4850,3200 4950,3200 5050,3200 5150,3200 5250,3200 5350,3200 5450,3200 5550,3200 5650,3200 5750,3200 5850,3200 100,3300 200,3300 300,3300 400,3300 500,3300 600,3300 700,3300 800,3300 2800,3300 2900,3300 3000,3300 3100,3300 3200,3300 3300,3300 3400,3300 3500,3300 3600,3300 3700,3300 3800,3300 3900,3300 4000,3300 4100,3300 4200,3300 4600,3300 4700,3300 4800,3300 4900,3300 5000,3300 5100,3300 5200,3300 5300,3300 5400,3300 5500,3300 5600,3300 150,3400 250,3400 350,3400 450,3400 550,3400 650,3400 750,3400 850,3400 2750,3400 2850,3400 2950,3400 3050,3400 3150,3400 3250,3400 3350,3400 3450,3400 3550,3400 3650,3400 3750,3400 3850,3400 3950,3400 4050,3400 4150,3400 4250,3400 4550,3400 4650,3400 4750,3400 4850,3400 4950,3400 5050,3400 5150,3400 5250,3400 5350,3400 5450,3400 5550,3400 5650,3400 5750,3400 5850,3400 300,3500 400,3500 500,3500 600,3500 700,3500 800,3500 2800,3500 2900,3500 3000,3500 3100,3500 3200,3500 3300,3500 3400,3500 3500,3500 3600,3500 3700,3500 3800,3500 3900,3500 4000,3500 4100,3500 4200,3500 4300,3500 4500,3500 4600,3500 4700,3500 4800,3500 4900,3500 5000,3500 5100,3500 5200,3500 5300,3500 5400,3500 5500,3500 5600,3500 150,3600 250,3600 350,3600 450,3600 550,3600 650,3600 750,3600 850,3600 950,3600 1050,3600 1150,3600 1250,3600 1350,3600 1450,3600 1550,3600 1650,3600 1750,3600 1850,3600 1950,3600 2050,3600 2150,3600 2250,3600 2350,3600 2450,3600 2550,3600 2650,3600 2750,3600 2850,3600 2950,3600 3050,3600 3150,3600 3250,3600 3350,3600 3450,3600 3550,3600 3650,3600 3750,3600 3850,3600 3950,3600 4050,3600 4150,3600 4250,3600 4450,3600 4650,3600 4750,3600 4850,3600 4950,3600 5050,3600 5150,3600 5250,3600 5350,3600 5450,3600 5550,3600 5650,3600 5750,3600 5850,3600 150,3800 250,3800 350,3800 450,3800 550,3800 650,3800 750,3800 850,3800 950,3800 1050,3800 1150,3800 1250,3800 1350,3800 1450,3800 1550,3800 1650,3800 1750,3800 1850,3800 1950,3800 2050,3800 2150,3800 2250,3800 2350,3800 2450,3800 2550,3800 2650,3800 2750,3800 2850,3800 2950,3800 3050,3800 3150,3800 3250,3800 3350,3800 3450,3800 3550,3800 3650,3800 3750,3800 3850,3800 3950,3800 4050,3800 4150,3800 4250,3800 4350,3800 4450,3800 4550,3800 4650,3800 4750,3800 4850,3800 4950,3800 5050,3800 5150,3800 5250,3800 5350,3800 5450,3800 5550,3800 5650,3800 5750,3800 5850,3800
  other v3: 1324.14,430.91 1809,637 1552,641 1571,857 1806,867 464,979 680.54,979 1865,1031 2081,1031 1302.21,1156.91 464,1195.54 686.27,1201.27 1866,1247 2081,1250 4332,2685 4075,2902 4331,2902 4311.73,3336.73 4528.27,3336.73 4311.73,3553.27 4528.27,3553.27
B-IP: J2.SIG U1.2 | length 419.1
  Top Layer w13.3: J2.SIG@43.5,787.4 U1.2@462.6,787.4
B-OP: J3.SIG U5.2 | length 1122
  Top Layer w13.3: U5.2@4740,3149.61 J3.SIG@5862.01,3149.61
CoCap_U_VectorModulator1: C4_U_VectorModulator1.2 L1_U_VectorModulator1.2 U4_U_VectorModulator1.13 U4_U_VectorModulator1.14 | length 151.9
  Top Layer w10: U4_U_VectorModulator1.14@1333.98,488.2 U4_U_VectorModulator1.13@1353.67,488.2 1353.67,565.3 cw(c1371.63,565.3) C4_U_VectorModulator1.2@1358.93,578 L1_U_VectorModulator1.2@1358.93,619
CoCap_U_VectorModulator2: C4_U_VectorModulator2.2 L1_U_VectorModulator2.2 U4_U_VectorModulator2.13 U4_U_VectorModulator2.14 | length 152.9
  Top Layer w10: U4_U_VectorModulator2.14@1312.06,1214.2 U4_U_VectorModulator2.13@1331.74,1214.2 1331.74,1299.16 1336.58,1304 C4_U_VectorModulator2.2@1337,1304 L1_U_VectorModulator2.2@1337,1345
HMCIN_U_VectorModulator1: U4_U_VectorModulator1.3 U6_U_VectorModulator1.3 | length 87.6
  Top Layer w10: U6_U_VectorModulator1.3@1184.97,411.02 cw(c1195.02,411.02) 1195.02,421.07 U4_U_VectorModulator1.3@1266.86,421.07
HMCIN_U_VectorModulator2: U4_U_VectorModulator2.3 U6_U_VectorModulator2.3 | length 75.2
  Top Layer w10: U6_U_VectorModulator2.3@1172.3,1137.51 cw(c1195.38,1114.43) 1195.38,1147.07 U4_U_VectorModulator2.3@1244.93,1147.07
HMCINbar_U_VectorModulator1: U4_U_VectorModulator1.2 U6_U_VectorModulator1.4 | length 87.2
  Top Layer w10: U6_U_VectorModulator1.4@1184.97,450 ccw(c1194.21,450) 1194.21,440.76 U4_U_VectorModulator1.2@1266.86,440.76
HMCINbar_U_VectorModulator2: U4_U_VectorModulator2.2 U6_U_VectorModulator2.4 | length 75.2
  Top Layer w10: U6_U_VectorModulator2.4@1172.3,1176.49 ccw(c1195.8,1199.98) 1195.8,1166.76 U4_U_VectorModulator2.2@1244.93,1166.76
I1: P1.3 U4_U_VectorModulator2.5 | length 1262.5
  Top Layer w10: P1.3@728,283 732.59,278.41 cw(c729.17,275) P1.3@734,275 ; v4(1240.31,1012) 1240.31,1067.26 cw(c1272.69,1067.26) U4_U_VectorModulator2.5@1272.69,1099.63
  Bottom Layer w10: P1.3@734,275 734,311.58 cw(c834,311.58) 763.29,382.29 770,389 cw(c815.87,343.13) 815.87,408 889.95,408 ccw(c889.95,418) 890.66,408.03 905.74,409.1 cw(c906.49,399.13) 906,409.12 ccw(c901,512.24) 970.74,436.12 ccw(c964,443.5) 974,443.55 974,922.58 cw(c1074,922.58) 1003.29,993.29 1009,999 cw(c1040.38,967.62) 1040.38,1012 v4(1240.31,1012)
I2: P1.4 U4_U_VectorModulator1.5 | length 703.5
  Top Layer w10: P1.4@734,175 732.41,175 cw(c732.41,178.41) 730,176 730.71,176.71 747.71,193.71 cw(c818.42,123) 818.42,223 1221.81,223 ; 1221.86,223 ccw(c1221.86,296.04) 1273.54,244.43 ccw(c1222.55,295.35) 1294.61,295.35 U4_U_VectorModulator1.5@1294.61,373.63
NetC1_U_VectorModulator1_1: C1_U_VectorModulator1.1 U4_U_VectorModulator1.9 | length 73.6
  Top Layer w13.3: U4_U_VectorModulator1.9@1381.43,401.39 1454.86,401.39 C1_U_VectorModulator1.1@1454.98,401.51
NetC1_U_VectorModulator1_2: C1_U_VectorModulator1.2 R7.1 R8.1 | length 186.4
  Top Layer w13.3: C1_U_VectorModulator1.2@1494.35,401.51 1495.26,402.41 1679.1,402.41 R8.1@1680,403.32
NetC1_U_VectorModulator2_1: C1_U_VectorModulator2.1 U4_U_VectorModulator2.9 | length 62.2
  Top Layer w13.3: U4_U_VectorModulator2.9@1359.5,1127.39 1420.7,1127.39 cw(c1420.7,1126.07) C1_U_VectorModulator2.1@1421.63,1127
NetC1_U_VectorModulator2_2: C1_U_VectorModulator2.2 R5.1 R6.1 | length 254.4
  Top Layer w13.3: C1_U_VectorModulator2.2@1460.39,1126.79 R5.1@1584.39,1126.79 ; C1_U_VectorModulator2.2@1461,1127 R5.1@1585,1127 cw(c1591,1119) R5.1@1591,1129
NetC2_U_VectorModulator1_2: C2_U_VectorModulator1.2 U6_U_VectorModulator1.2 | length 49.1
  Top Layer w10: U6_U_VectorModulator1.2@1158.98,411.02 1159.22,410.7 cw(c1146.39,401.8) 1162,401.8 1162,367.04 cw(c1152,367.04) C2_U_VectorModulator1.2@1161,362.69
NetC2_U_VectorModulator2_2: C2_U_VectorModulator2.2 U6_U_VectorModulator2.2 | length 49.2
  Top Layer w10: C2_U_VectorModulator2.2@1142.33,1089.35 ccw(c1132.71,1098.97) 1146.31,1098.97 U6_U_VectorModulator2.2@1146.31,1137.51
NetJ5_SIG: J5.SIG J6.SIG | length 5819.3
  Top Layer w13.3: J5.SIG@43.5,3690 44.41,3690.91 5861.1,3690.91 J6.SIG@5862.01,3690
NetJ7_C: J7.C R6.2 | length 356
  Top Layer w13.3: R6.2@1624.37,1129 J7.C@1980.34,1129
NetJ8_C: J8.C R8.2 | length 283.2
  Top Layer w13.3: R8.2@1679,454.27 1679,731 cw(c1689,731) 1680.77,736.68 J8.C@1681,737 J8.C@1681,737
NetJ9_C: J9.C R10.2 | length 301.3
  Top Layer w13.3: J9.C@4203,2783 R10.2@4203,3084.31
NetR9_1: R9.1 R10.1 U3.2 | length 74.9
  Top Layer w13.3: U3.2@4128.98,3125 4129.67,3124.31 4202.63,3124.31 R9.1@4203.31,3123.62
Q1: P1.1 U4_U_VectorModulator2.6 | length 1207
  Top Layer w10: v4(1290.31,985) 1290.31,1097.57 cw(c1292.37,1097.57) U4_U_VectorModulator2.6@1292.37,1099.63
  Bottom Layer w10: P1.1@834,275 cw(c838.83,275) 835.41,278.41 836,279 837,279 836,278 893.58,278 ccw(c893.58,378) 964.29,307.29 973.67,316.67 ccw(c902.96,387.38) 1002.96,387.38 1002.96,466 1002,856 1002,904.4 cw(c1097.6,904.4) 1030,972 cw(c1058.97,943.03) 1058.97,984 1289.31,984 ccw(c1289.31,985) v4(1290.31,985)
Q2: P1.2 U4_U_VectorModulator1.6 | length 649
  Top Layer w10: U4_U_VectorModulator1.6@1314.3,373.63 ccw(c1314.3,371.57) 1312.24,371.57 1312.24,332.26 ccw(c1322.24,332.27) v4(1316.61,324)
  Bottom Layer w10: P1.2@834,175 1235.23,175 ccw(c1235.23,256.38) 1316.61,256.38 v4(1316.61,324)
RF-C1: R9.2 U5.6 | length 457
  Top Layer w13.3: R9.2@4244,3123.62 U5.6@4701.02,3124.16
RF-C1-1: R5.2 U3.4 | length 56667.7
  Top Layer w13.3: R5.2@1585,1166.37 1585,1380 cw(c1685,1380) 1685,1480 2845,1480 ccw(c2845,1541) 2906,1541 2906,1771 ccw(c2806,1771) 2806,1871 2690.34,1871 2683.69,1871 ccw(c2683.69,1846.85) 2659.54,1846.85 2659.54,1617.17 cw(c2635.39,1617.17) 2635.39,1593.01 cw(c2635.39,1617.17) 2611.23,1617.17 2611.23,1963.1 ccw(c2587.08,1963.1) 2587.08,1987.25 ccw(c2587.08,1963.1) 2562.93,1963.1 2562.93,1617.17 cw(c2538.78,1617.17) 2538.78,1593.01 cw(c2538.78,1617.17) 2514.62,1617.17 2514.62,1963.1 ccw(c2490.47,1963.1) 2490.47,1987.25 ccw(c2490.47,1963.1) 2466.32,1963.1 2466.32,1617.17 cw(c2442.17,1617.17) 2442.17,1593.01 cw(c2442.17,1617.17) 2418.01,1617.17 2418.01,1963.1 ccw(c2393.86,1963.1) 2393.86,1987.25 ccw(c2393.86,1963.1) 2369.71,1963.1 2369.71,1617.17 cw(c2345.56,1617.17) 2345.56,1593.01 cw(c2345.56,1617.17) 2321.4,1617.17 2321.4,1963.1 ccw(c2297.25,1963.1) 2297.25,1987.25 ccw(c2297.25,1963.1) 2273.1,1963.1 2273.1,1617.17 cw(c2248.95,1617.17) 2248.95,1593.01 cw(c2248.95,1617.17) 2224.79,1617.17 2224.79,1963.1 ccw(c2200.64,1963.1) 2200.64,1987.25 ccw(c2200.64,1963.1) 2176.49,1963.1 2176.49,1617.17 cw(c2152.34,1617.17) 2152.34,1593.01 cw(c2152.34,1617.17) 2128.18,1617.17 2128.18,1963.1 ccw(c2104.03,1963.1) 2104.03,1987.25 ccw(c2104.03,1963.1) 2079.88,1963.1 2079.88,1617.17 cw(c2055.73,1617.17) 2055.73,1593.01 cw(c2055.73,1617.17) 2031.57,1617.17 2031.57,1963.1 ccw(c2007.42,1963.1) 2007.42,1987.25 ccw(c2007.42,1963.1) 1983.27,1963.1 1983.27,1617.17 cw(c1959.12,1617.17) 1959.12,1593.01 cw(c1959.12,1617.17) 1934.96,1617.17 1934.96,1963.1 ccw(c1910.81,1963.1) 1910.81,1987.25 ccw(c1910.81,1963.1) 1886.66,1963.1 1886.66,1617.17 cw(c1862.51,1617.17) 1862.51,1593.01 cw(c1862.51,1617.17) 1838.35,1617.17 1838.35,1963.1 ccw(c1814.2,1963.1) 1814.2,1987.25 ccw(c1814.2,1963.1) 1790.05,1963.1 1790.05,1617.17 cw(c1765.9,1617.17) 1765.9,1593.01 cw(c1765.9,1617.17) 1741.74,1617.17 1741.74,1963.1 ccw(c1717.59,1963.1) 1717.59,1987.25 ccw(c1717.59,1963.1) 1693.44,1963.1 1693.44,1617.17 cw(c1669.29,1617.17) 1669.29,1593.01 cw(c1669.29,1617.17) 1645.13,1617.17 1645.13,1963.1 ccw(c1620.98,1963.1) 1620.98,1987.25 ccw(c1620.98,1963.1) 1596.83,1963.1 1596.83,1617.17 cw(c1572.68,1617.17) 1572.68,1593.01 cw(c1572.68,1617.17) 1548.52,1617.17 1548.52,1963.1 ccw(c1524.37,1963.1) 1524.37,1987.25 ccw(c1524.37,1963.1) 1500.22,1963.1 1500.22,1617.17 cw(c1476.07,1617.17) 1476.07,1593.01 cw(c1476.07,1617.17) 1451.91,1617.17 1451.91,1963.1 ccw(c1427.76,1963.1) 1427.76,1987.25 ccw(c1427.76,1963.1) 1403.61,1963.1 1403.61,1617.17 cw(c1379.46,1617.17) 1379.46,1593.01 cw(c1379.46,1617.17) 1355.3,1617.17 1355.3,1963.1 ccw(c1331.15,1963.1) 1331.15,1987.25 ccw(c1331.15,1963.1) 1307,1963.1 1307,1617.17 cw(c1282.85,1617.17) 1282.85,1593.01 cw(c1282.85,1617.17) 1258.69,1617.17 1258.69,1963.1 ccw(c1234.54,1963.1) 1234.54,1987.25 ccw(c1234.54,1963.1) 1210.39,1963.1 1210.39,1617.17 cw(c1186.24,1617.17) 1186.24,1593.01 cw(c1186.24,1617.17) 1162.08,1617.17 1162.08,1963.1 ccw(c1137.93,1963.1) 1137.93,1987.25 ccw(c1137.93,1963.1) 1113.78,1963.1 1113.78,1617.17 cw(c1089.63,1617.17) 1089.63,1593.01 cw(c1089.63,1617.17) 1065.47,1617.17 1065.47,1963.1 ccw(c1041.32,1963.1) 1041.32,1987.25 ccw(c1041.32,1963.1) 1017.17,1963.1 1017.17,1617.17 cw(c993.02,1617.17) 993.02,1593.01 cw(c993.02,1617.17) 968.86,1617.17 968.86,1963.1 ccw(c944.71,1963.1) 944.71,1987.25 ccw(c944.71,1963.1) 920.56,1963.1 920.56,1617.17 cw(c896.41,1617.17) 896.41,1593.01 cw(c896.41,1617.17) 872.25,1617.17 872.25,1963.1 ccw(c848.1,1963.1) 848.1,1987.25 ccw(c848.1,1963.1) 823.95,1963.1 823.95,1895.15 cw(c799.8,1895.15) 799.8,1871 735.1,1871 689,1871 cw(c689,1934) 626,1934 626,2137.72 626,2144.38 ccw(c601.85,2144.38) 601.85,2168.53 184.13,2168.53 cw(c184.13,2192.68) 159.98,2192.68 cw(c184.13,2192.68) 184.13,2216.83 783.45,2216.83 ccw(c783.45,2240.99) 807.6,2240.99 ccw(c783.45,2240.99) 783.45,2265.14 184.13,2265.14 cw(c184.13,2289.29) 159.98,2289.29 cw(c184.13,2289.29) 184.13,2313.44 783.45,2313.44 ccw(c783.45,2337.6) 807.6,2337.6 ccw(c783.45,2337.6) 783.45,2361.75 184.13,2361.75 cw(c184.13,2385.9) 159.98,2385.9 cw(c184.13,2385.9) 184.13,2410.05 783.45,2410.05 ccw(c783.45,2434.21) 807.6,2434.21 ccw(c783.45,2434.21) 783.45,2458.36 184.13,2458.36 cw(c184.13,2482.51) 159.98,2482.51 cw(c184.13,2482.51) 184.13,2506.66 783.45,2506.66 ccw(c783.45,2530.82) 807.6,2530.82 ccw(c783.45,2530.82) 783.45,2554.97 184.13,2554.97 cw(c184.13,2579.12) 159.98,2579.12 cw(c184.13,2579.12) 184.13,2603.27 783.45,2603.27 ccw(c783.45,2627.43) 807.6,2627.43 ccw(c783.45,2627.43) 783.45,2651.58 184.13,2651.58 cw(c184.13,2675.73) 159.98,2675.73 cw(c184.13,2675.73) 184.13,2699.88 783.45,2699.88 ccw(c783.45,2724.04) 807.6,2724.04 ccw(c783.45,2724.04) 783.45,2748.19 184.13,2748.19 cw(c184.13,2772.34) 159.98,2772.34 cw(c184.13,2772.34) 184.13,2796.49 783.45,2796.49 ccw(c783.45,2820.65) 807.6,2820.65 ccw(c783.45,2820.65) 783.45,2844.8 184.13,2844.8 cw(c184.13,2868.95) 159.98,2868.95 cw(c184.13,2868.95) 184.13,2893.1 783.45,2893.1 ccw(c783.45,2917.26) 807.6,2917.26 ccw(c783.45,2917.26) 783.45,2941.41 184.13,2941.41 cw(c184.13,2965.56) 159.98,2965.56 cw(c184.13,2965.56) 184.13,2989.71 601.85,2989.71 ccw(c601.85,3013.87) 626,3013.87 626,3052 626.04,3054.89 cw(c726,3052) 626.46,3061.54 cw(c726,3052) 726,3152 870.63,3152 877.29,3152 ccw(c877.29,3176.15) 901.44,3176.15 901.44,3480.48 cw(c925.59,3480.48) 925.59,3504.64 cw(c925.59,3480.48) 949.74,3480.48 949.74,2900.24 ccw(c973.89,2900.24) 973.89,2876.09 ccw(c973.89,2900.24) 998.05,2900.24 998.05,3480.48 cw(c1022.2,3480.48) 1022.2,3504.64 cw(c1022.2,3480.48) 1046.35,3480.48 1046.35,2900.24 ccw(c1070.51,2900.24) 1070.51,2876.09 ccw(c1070.51,2900.24) 1094.66,2900.24 1094.66,3480.48 cw(c1118.81,3480.48) 1118.81,3504.64 cw(c1118.81,3480.48) 1142.96,3480.48 1142.96,2900.24 ccw(c1167.11,2900.24) 1167.11,2876.09 ccw(c1167.11,2900.24) 1191.27,2900.24 1191.27,3480.48 cw(c1215.42,3480.48) 1215.42,3504.64 cw(c1215.42,3480.48) 1239.57,3480.48 1239.57,2900.24 ccw(c1263.72,2900.24) 1263.72,2876.09 ccw(c1263.72,2900.24) 1287.88,2900.24 1287.88,3480.48 cw(c1312.03,3480.48) 1312.03,3504.64 cw(c1312.03,3480.48) 1336.18,3480.48 1336.18,2900.24 ccw(c1360.34,2900.24) 1360.34,2876.09 ccw(c1360.34,2900.24) 1384.49,2900.24 1384.49,3480.48 cw(c1408.64,3480.48) 1408.64,3504.64 cw(c1408.64,3480.48) 1432.79,3480.48 1432.79,2900.24 ccw(c1456.95,2900.24) 1456.95,2876.09 ccw(c1456.95,2900.24) 1481.1,2900.24 1481.1,3480.48 cw(c1505.25,3480.48) 1505.25,3504.64 cw(c1505.25,3480.48) 1529.4,3480.48 1529.4,2900.24 ccw(c1553.55,2900.24) 1553.55,2876.09 ccw(c1553.55,2900.24) 1577.71,2900.24 1577.71,3480.48 cw(c1601.86,3480.48) 1601.86,3504.64 cw(c1601.86,3480.48) 1626.01,3480.48 1626.01,2900.24 ccw(c1650.16,2900.24) 1650.16,2876.09 ccw(c1650.16,2900.24) 1674.32,2900.24 1674.32,3480.48 cw(c1698.47,3480.48) 1698.47,3504.64 cw(c1698.47,3480.48) 1722.62,3480.48 1722.62,2900.24 ccw(c1746.78,2900.24) 1746.78,2876.09 ccw(c1746.78,2900.24) 1770.93,2900.24 1770.93,3480.48 cw(c1795.08,3480.48) 1795.08,3504.64 cw(c1795.08,3480.48) 1819.23,3480.48 1819.23,2900.24 ccw(c1843.39,2900.24) 1843.39,2876.09 ccw(c1843.39,2900.24) 1867.54,2900.24 1867.54,3480.48 cw(c1891.69,3480.48) 1891.69,3504.64 cw(c1891.69,3480.48) 1915.84,3480.48 1915.84,2900.24 ccw(c1939.99,2900.24) 1939.99,2876.09 ccw(c1939.99,2900.24) 1964.15,2900.24 1964.15,3480.48 cw(c1988.3,3480.48) 1988.3,3504.64 cw(c1988.3,3480.48) 2012.45,3480.48 2012.45,2900.24 ccw(c2036.61,2900.24) 2036.61,2876.09 ccw(c2036.61,2900.24) 2060.76,2900.24 2060.76,3480.48 cw(c2084.91,3480.48) 2084.91,3504.64 cw(c2084.91,3480.48) 2109.06,3480.48 2109.06,2900.24 ccw(c2133.22,2900.24) 2133.22,2876.09 ccw(c2133.22,2900.24) 2157.37,2900.24 2157.37,3480.48 cw(c2181.52,3480.48) 2181.52,3504.64 cw(c2181.52,3480.48) 2205.67,3480.48 2205.67,2900.24 ccw(c2229.82,2900.24) 2229.82,2876.09 ccw(c2229.82,2900.24) 2253.98,2900.24 2253.98,3480.48 cw(c2278.13,3480.48) 2278.13,3504.64 cw(c2278.13,3480.48) 2302.28,3480.48 2302.28,2900.24 ccw(c2326.43,2900.24) 2326.43,2876.09 ccw(c2326.43,2900.24) 2350.59,2900.24 2350.59,3480.48 cw(c2374.74,3480.48) 2374.74,3504.64 cw(c2374.74,3480.48) 2398.89,3480.48 2398.89,2900.24 ccw(c2423.05,2900.24) 2423.05,2876.09 ccw(c2423.05,2900.24) 2447.2,2900.24 2447.2,3480.48 cw(c2471.35,3480.48) 2471.35,3504.64 cw(c2471.35,3480.48) 2495.5,3480.48 2495.5,2900.24 ccw(c2519.66,2900.24) 2519.66,2876.09 ccw(c2519.66,2900.24) 2543.81,2900.24 2543.81,3480.48 cw(c2567.96,3480.48) 2567.96,3504.64 cw(c2567.96,3480.48) 2592.11,3480.48 2592.11,2900.24 ccw(c2616.26,2900.24) 2616.26,2876.09 ccw(c2616.26,2900.24) 2640.42,2900.24 2640.42,3480.48 cw(c2664.57,3480.48) 2664.57,3504.64 cw(c2664.57,3480.48) 2688.72,3480.48 2688.72,3084.92 ccw(c2712.88,3084.92) 2712.88,3060.77 ccw(c2712.88,3084.92) 2737.03,3084.92 2737.03,3127.85 cw(c2761.18,3127.85) 2761.18,3152 2785.33,3152 2843.05,3152 U3.4@4088.98,3152